# Altium PCB PCB2.PcbDoc
Units mm, origin at the board's own origin, x right, y up, seen from the top; angles counter-clockwise.
Board outline 72.9 x 66.06 mm, 2 copper layers (Top Layer, Bottom Layer); 41 components, 27 nets, 119 pads, 4 vias.
Unrouted connection lines stored in the file: 2.
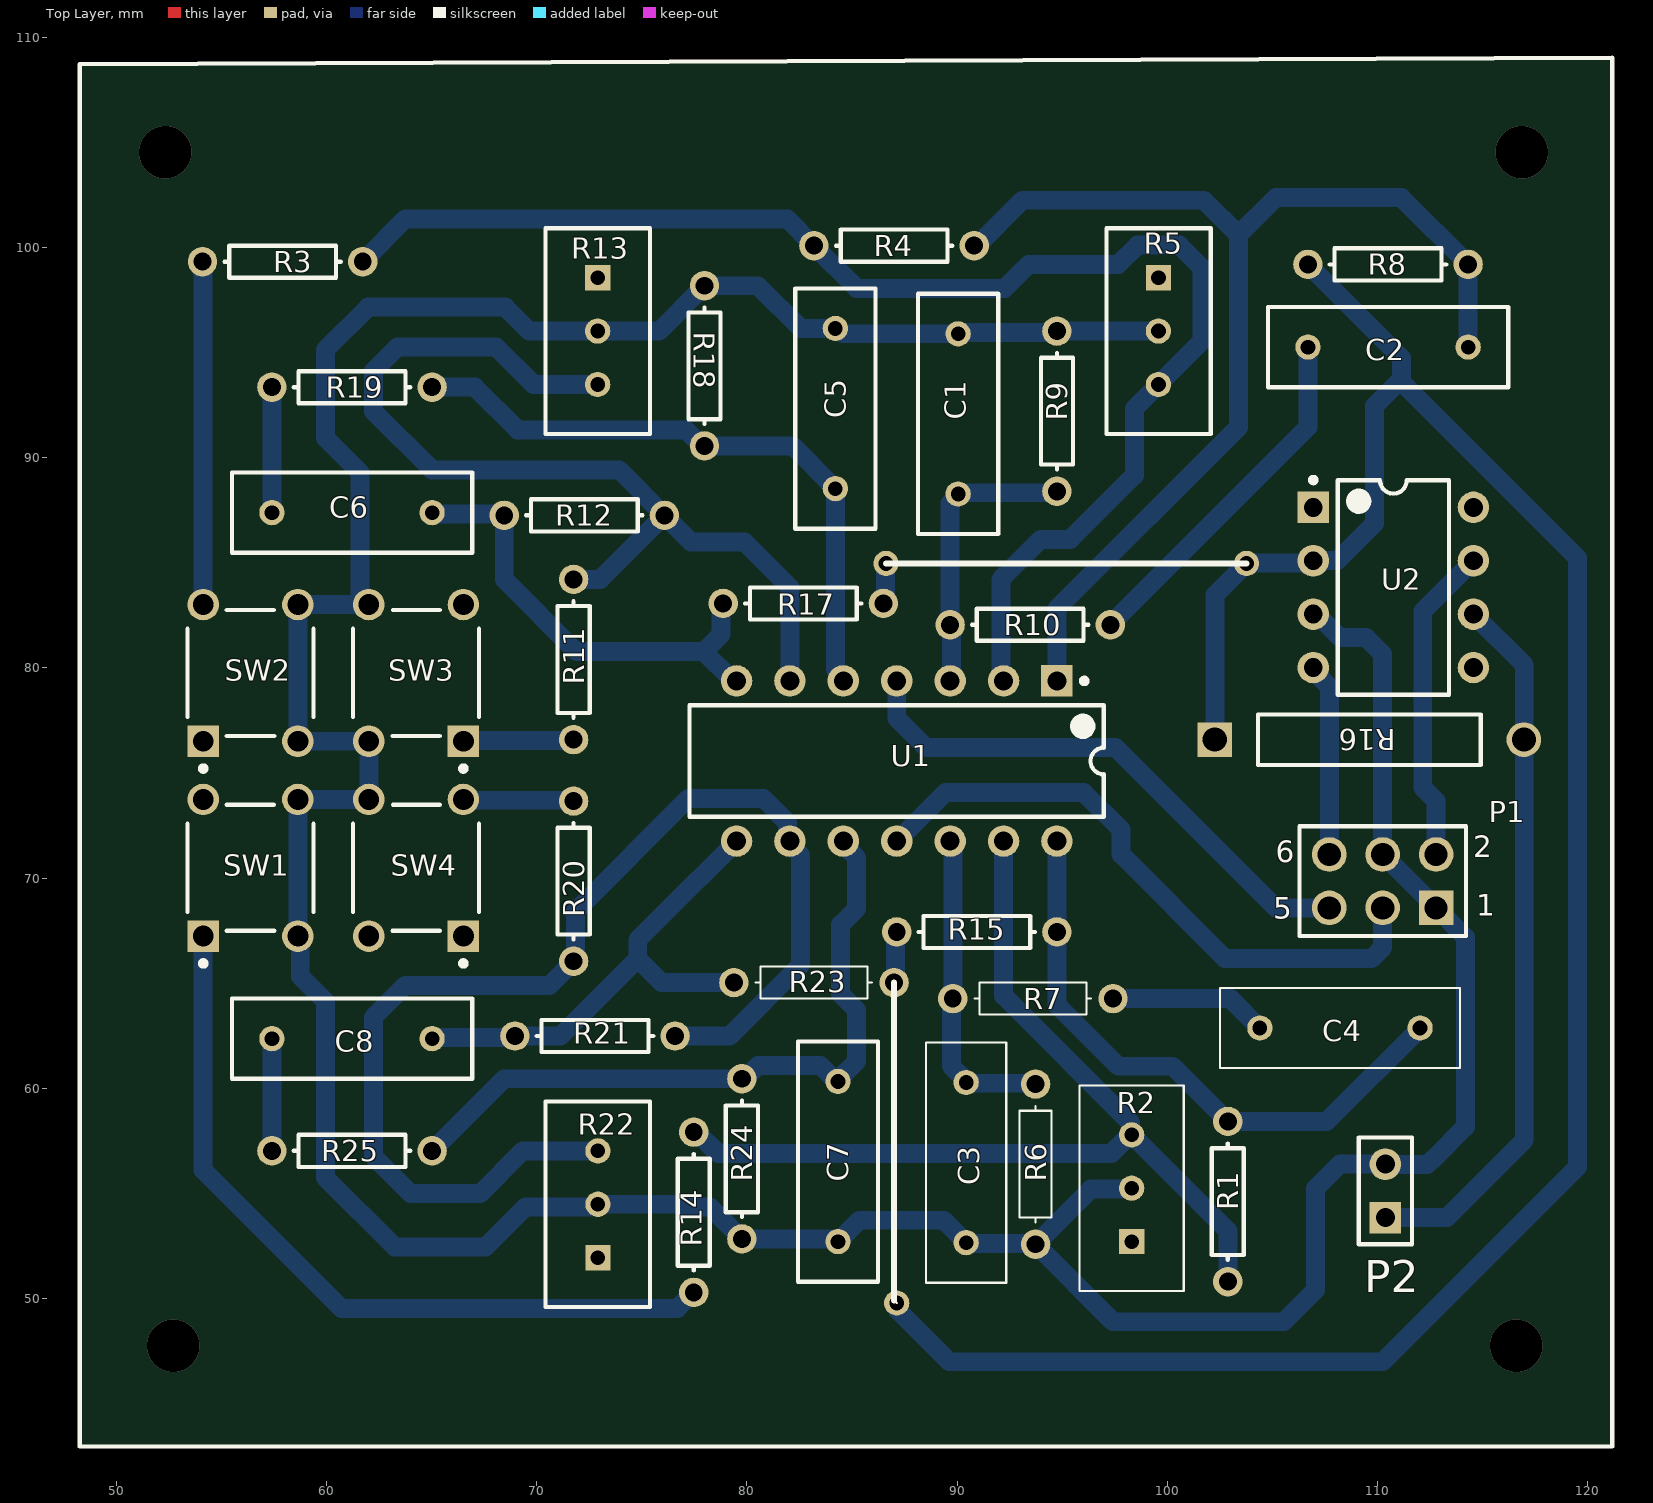
[diagram p0: Top Layer view]
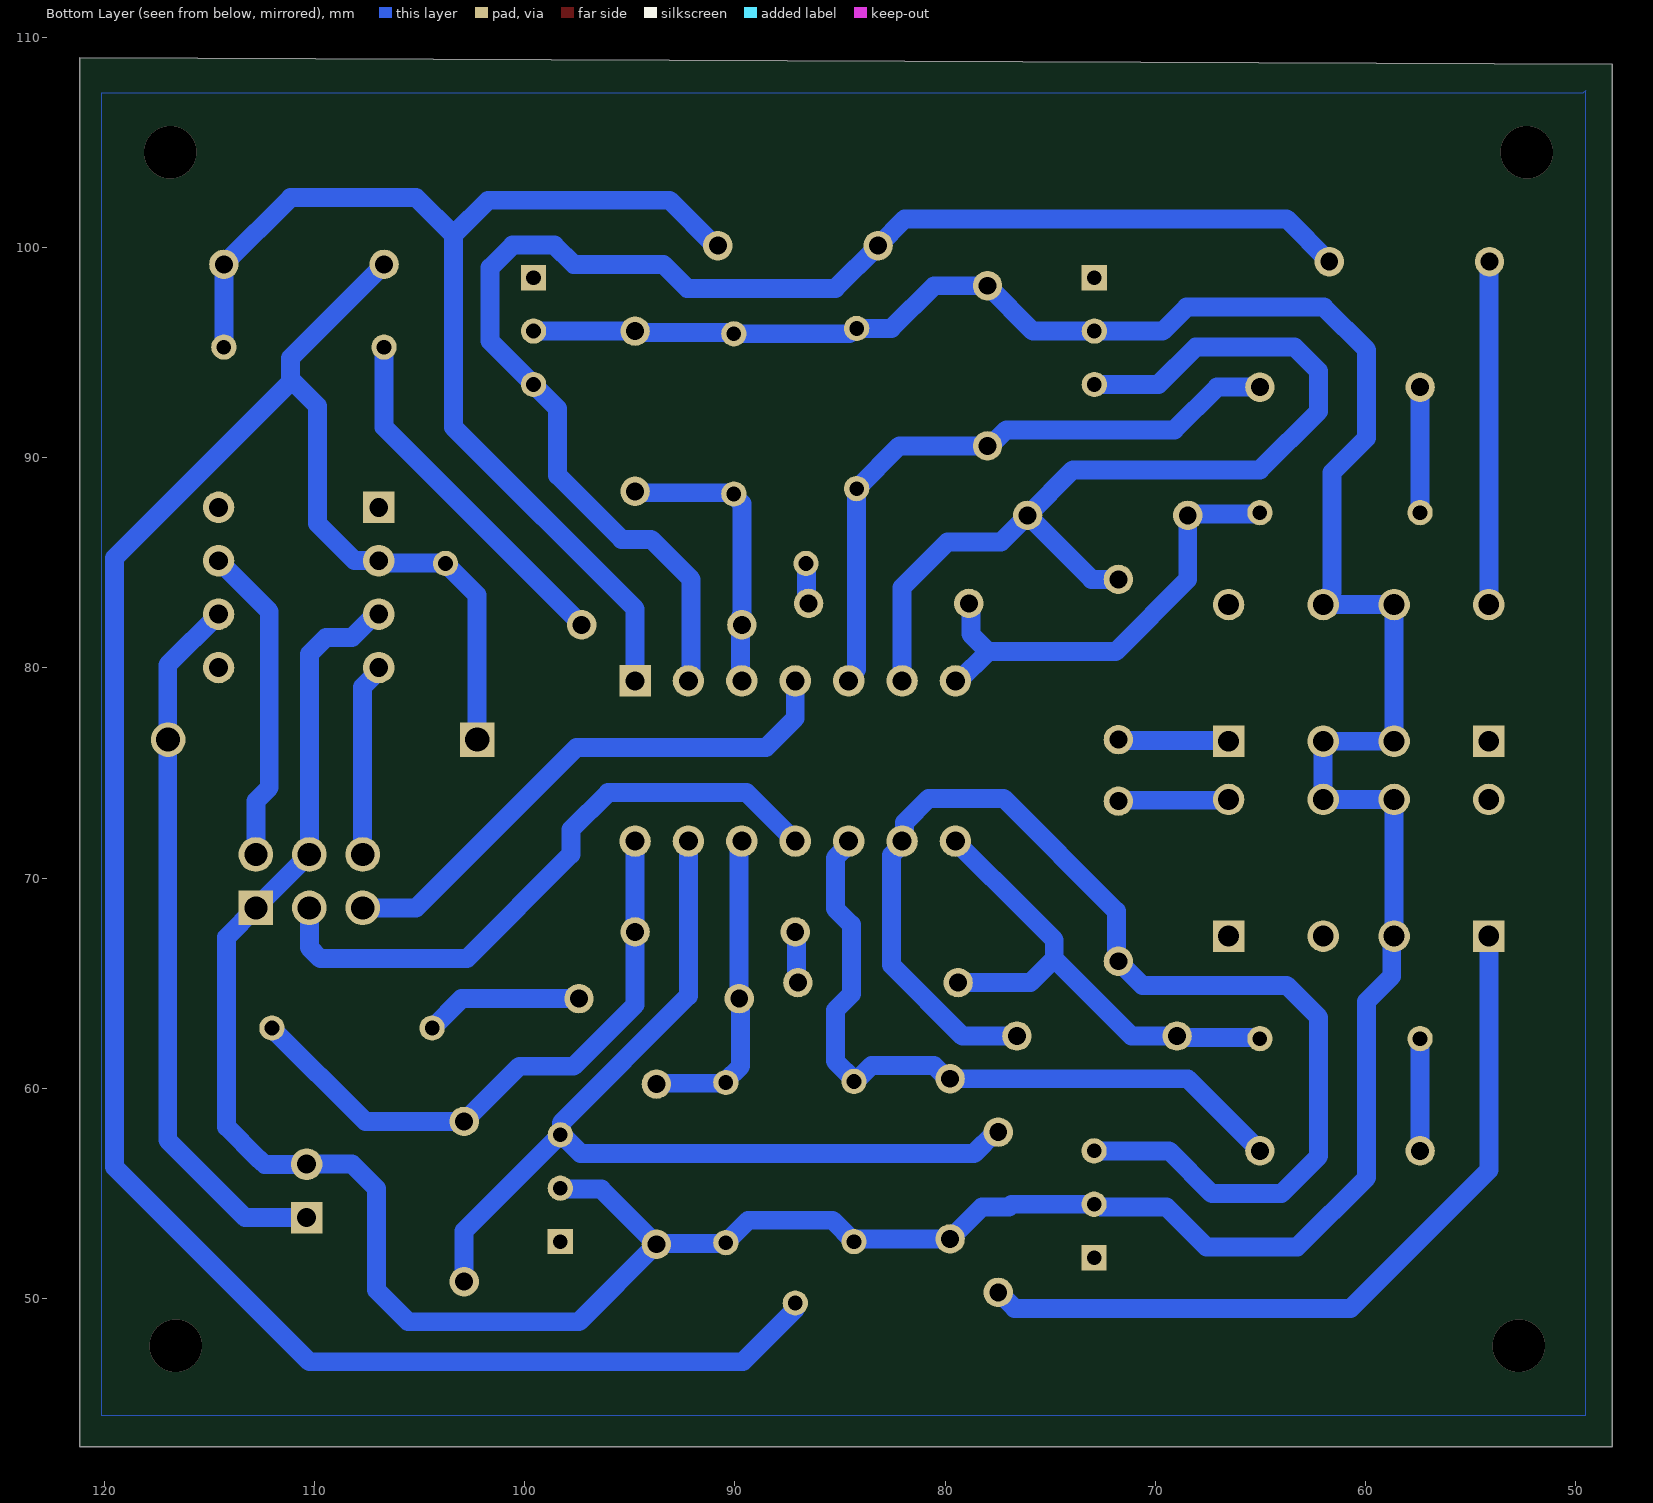
[diagram p1: Bottom Layer view, seen from below]

## Layer stack, top to bottom
Top Solder: solder mask 0.0102, Solder Resist, Dk 3.5
Top Layer: signal copper 0.0356
Dielectric 1: dielectric 0.32, FR-4, Dk 4.8
Bottom Layer: signal copper 0.0356
Bottom Solder: solder mask 0.0102, Solder Resist, Dk 3.5

## Board outline
48.26,42.958 48.26,50.419 48.26,108.706 121.158,109.018 121.158,93.091 121.158,42.958

## Design rules (kind name [scope] priority, off if disabled: settings)
Clearance [All] p1: gap=0.8 ignorepadtopadclearanceinfootprint=FALSE except(0: Arc-Hole Track-Hole SMDPad-Hole THPad-Hole Via-Hole Fill-Hole Poly-Hole Region-Hole Text-Hole; 0.254: Arc-Text Track-Text SMDPad-Text THPad-Text Via-Text Fill-Text Poly-Text Region-Text Text-Text; 0.3: Arc-SMDPad Arc-Via Track-SMDPad Track-Via SMDPad-SMDPad SMDPad-THPad SMDPad-Via THPad-THPad THPad-Via Via-Via; 0.5: Arc-THPad Track-THPad; 0.6: Arc-Arc Arc-Track Track-Track)
PolygonConnect [All] p1: connectstyle=Relief reliefconductorwidth=0.254 reliefentries=4 polygonreliefangle="90 Angle" airgapwidth=0.254
RoutingVias [All] p1: holewidth=0.711 width=1.27 viastyle="Through Hole" minholewidth=0.711 minwidth=1.27 maxholewidth=0.711 maxwidth=1.27
SolderMaskExpansion [All] p1: expansion=0.102 istentingtop=FALSE
Width [All] p1: maxlimit=1 minlimit=0.8 preferedwidth=0.9 toplayer_prefwidth=0.8 minimp=50.000000 maximp=50.000000 favimp=50.000000
30 further rules are at their usual default settings.

## Components (designator, comment, footprint, x,y, rotation, side; value= is the part's Value field where it differs from the comment)
C1 "Cap" RAD-0.3 90.043,92.075 r90 top value=100nF
C2 "Cap" RAD-0.3 110.49,95.25 r0 top value=100nF
C3 "Cap" RAD-0.3 90.424,56.465 r270 top value=100nF
C4 "Cap" RAD-0.3 108.204,62.865 r0 top value=100nF
C5 "Cap" RAD-0.3 84.201,92.329 r90 top value=100nF
C6 "Cap" RAD-0.3 61.214,87.376 r0 top value=100nF
C7 "Cap" RAD-0.3 84.328,56.515 r270 top value=100nF
C8 "Cap" RAD-0.3 61.214,62.357 r0 top value=100nF
P1 "61300621121" 61300621121 110.236,69.85 r180 top
P2 "Header 2" HDR1X2 110.363,53.848 r90 top
R1 "Res1" AXIAL-0.3 102.87,54.61 r270 top value=1K
R2 "3296W-1-204LF" FP-3296W-MFG 98.293,55.245 r0 top
R3 "Res1" AXIAL-0.3 57.912,99.314 r0 top value=50K
R4 "Res1" AXIAL-0.3 86.995,100.076 r180 top value=1K
R5 "3296W-1-204LF" FP-3296W-MFG 99.573,96.012 r180 top
R6 "Res1" AXIAL-0.3 93.726,56.388 r270 top value=6K
R7 "Res1" AXIAL-0.3 93.599,64.262 r0 top value=6K
R8 "Res1" AXIAL-0.3 110.49,99.187 r0 top value=8.33K
R9 "Res1" AXIAL-0.3 94.742,92.202 r90 top value=1.5K
R10 "Res1" AXIAL-0.3 93.472,82.042 r0 top value=1.5K
R11 "Res1" AXIAL-0.3 71.755,80.391 r90 top value=50K
R12 "Res1" AXIAL-0.3 72.263,87.249 r0 top value=1K
R13 "3296W-1-204LF" FP-3296W-MFG 72.903,96.012 r180 top
R14 "Res1" AXIAL-0.3 77.47,54.102 r90 top value=50K
R15 "Res1" AXIAL-0.3 90.932,67.437 r0 top value=3K
R16 "1k" RESA86-1060X240 109.601,76.581 r0 top
R17 "Res1" AXIAL-0.3 82.677,83.058 r180 top value=2.5K
R18 "Res1" AXIAL-0.3 77.978,94.361 r90 top value=2K
R19 "Res1" AXIAL-0.3 61.214,93.345 r180 top value=2K
R20 "Res1" AXIAL-0.3 71.755,69.85 r270 top value=50K
R21 "Res1" AXIAL-0.3 72.771,62.484 r0 top value=1K
R22 "3296W-1-204LF" FP-3296W-MFG 72.903,54.483 r0 top
R23 "Res1" AXIAL-0.3 83.185,65.024 r180 top value=420
R24 "Res1" AXIAL-0.3 79.756,56.642 r270 top value=3K
R25 "Res1" AXIAL-0.3 61.214,57.023 r180 top value=3K
SW1 "1825910-6" TECO-1825910-6_V#1 56.388,70.485 r90 top
SW2 "1825910-6" TECO-1825910-6_V#1 56.388,79.756 r90 top
SW3 "1825910-6" TECO-1825910-6_V#2 64.262,79.756 r90 top
SW4 "1825910-6" TECO-1825910-6_V#2 64.262,70.485 r90 top
U1 "LM324N" N0014A 87.122,75.565 r270 top
U2 "UA741CPE4" TI-P8 110.744,83.82 r0 top

## Footprints (in the part's own frame and the unit in brackets; to place one, negate y for a bottom-side part, rotate by r counter-clockwise, add the part's x,y. Pads: shape width x height; smd on the part's side, far side on the other; paste and mask are expansions set on the pad)
61300621121 [mm] "Pin Header, pitch 2.54 mm, THT, Vertical, dual row, 6p"
  rect 1.65x1.65 hole 1.1: 1(-2.54,1.27)
  round 1.65 hole 1.1: 2(-2.54,-1.27) 3(0,1.27) 4(0,-1.27) 5(2.54,1.27) 6(2.54,-1.27)
  silkscreen extent -3.96,-2.61 3.96,2.61, body extent -3.81,-2.54 3.81,2.54, height 5.59
AXIAL-0.3 [mm] "Axial Device, Thru-Hole; 2 Leads; 0.3 in Pin Spacing"
  round 1.4 hole 0.85: 1(-3.81,0) 2(3.81,0)
  silkscreen extent -2.77,-0.76 2.77,0.76
FP-3296W-MFG [mm]
  rect 1.2x1.2 hole 0.7 paste-1000 mask+0: 1(0.005,-2.54)
  round 1.2 hole 0.7 paste-1000 mask+0: 2(0.005,0) 3(0.005,2.54)
  silkscreen extent -2.48,-4.89 2.48,4.89, body extent -2.58,-4.99 2.58,4.99, height 0.25
HDR1X2 [mm] "Connector; Header; 2 Position"
  rect 1.5x1.5 hole 0.9: 1(0,0)
  round 1.5 hole 0.9: 2(2.54,0)
  silkscreen extent -1.27,-1.27 3.81,1.27
N0014A [mm] "DIP, 14-Leads, Body 19.7x6.6mm, Pitch 2.54mm"
  rect 1.5x1.5 hole 0.9: 1(-3.81,7.62)
  round 1.5 hole 0.9: 2(-3.81,5.08) 3(-3.81,2.54) 4(-3.81,0) 5(-3.81,-2.54) 6(-3.81,-5.08) 7(-3.81,-7.62) 8(3.81,-7.62) 9(3.81,-5.08) 10(3.81,-2.54) 11(3.81,0) 12(3.81,2.54) 13(3.81,5.08) 14(3.81,7.62)
  silkscreen extent -3.93,-9.85 2.65,9.85, body extent -3.95,-9.85 3.95,9.85, height 5.08
RAD-0.3 [mm] "Radial Cap, Thru-Hole; 2 Leads; 0.3 in Pin Spacing"
  round 1.2 hole 0.7: 1(-3.81,0) 2(3.81,0)
  silkscreen extent -5.71,-1.91 5.71,1.91
RESA86-1060X240 [mm] "Axial Resistor, 2-Leads, Dia 2.4mm, Body Length 10.6mm"
  rect 1.65x1.65 hole 1.15: 1(-7.35,0)
  round 1.65 hole 1.15: 2(7.35,0)
  silkscreen extent -5.3,-1.2 5.3,1.2, body extent -5.3,-1.2 5.3,1.2, height 2.4
TECO-1825910-6_V#1 [mm] "Switch, 4-Leads, Body 5.99x5.99mm"
  rect 1.5x1.5 hole 0.99: 1(-3.25,2.25)
  round 1.5 hole 0.99: 2(3.25,2.25) 3(-3.25,-2.25) 4(3.25,-2.25)
  silkscreen extent -4.67,-3 3,3, body extent -3,-2.99 2.99,3, height 5
TECO-1825910-6_V#2 [mm] "Switch, 4-Leads, Body 5.99x5.99mm"
  rect 1.5x1.5 hole 0.99: 1(-3.25,-2.25)
  round 1.5 hole 0.99: 2(3.25,-2.25) 3(-3.25,2.25) 4(3.25,2.25)
  silkscreen extent -4.67,-3 3,3, body extent -3,-3 2.99,2.99, height 5
TI-P8 [mm] "DIP, 8-Leads, Body 9.59x6.35mm, Pitch 2.54mm"
  rect 1.5x1.5 hole 0.9: 1(-3.81,3.81)
  round 1.5 hole 0.9: 2(-3.81,1.27) 3(-3.81,-1.27) 4(-3.81,-3.81) 5(3.81,-3.81) 6(3.81,-1.27) 7(3.81,1.27) 8(3.81,3.81)
  silkscreen extent -3.93,-5.1 2.65,5.23, body extent -3.95,-5.07 3.95,5.07, height 5.08

## Part data
C1 C2 C3 C4 C5 C6 C7 C8: "Capacitor", LatestRevisionDate=17-Jul-2002, LatestRevisionNote="Re-released for DXP Platform.", PackageDescription="Radial Cap, Thru-Hole; 2 Leads; 0.3 in Pin Spacing", PackageReference=RAD-0.3, Published=8-Jun-2000, Publisher="Altium Limited"
P1: library part CMP-1502-01072-1, "THT Vertical Pin Header WR-PHD, Pitch 2.54 mm, Dual Row, 6 pins", Contact Resistance=20mOhm, Manufacturer="Wurth Elektronik", Operating Temperature=-40to105degC, Rated Current=3A, Withstanding Voltage=500VAC, Working Voltage=250VAC, Datasheet URL=https://katalog.we-online.de/em/datasheet/6130xx21121.pdf, Gender=Male, Manufacturer URL=http://www.we-online.de, Mounting Technology=THT, Orientation=Vertical, Package Reference=61300621121, Packaging=Bag, Part Number=61300621121, Pin Number=6, Pitch=2.54mm, Publisher=WurthElektronik, Row Number=Dual
P2: "Header, 2-Pin", LatestRevisionDate=17-Jul-2002, LatestRevisionNote="Re-released for DXP Platform.", Publisher="Altium Limited"
R1 R3 R4 R6 R7 R8 R9 R10 R11 R12 R14 R15 R17 R18 R19 R20 R21 R23 R24 R25: "Resistor", LatestRevisionDate=17-Jul-2002, LatestRevisionNote="Re-released for DXP Platform.", PackageDescription="Axial Device, Thru-Hole; 2 Leads; 0.3 in Pin Spacing", PackageReference=AXIAL-0.3, Published=8-Jun-2000, Publisher="Altium Limited"
R2 R5 R13 R22: library part CMP-07234-000048-1, "TRIMMER 200K OHM 0.5W PC PIN TOP", Color=Blue, Max Operating Temperature=125°C, Max Power Dissipation=500mW, Min Operating Temperature=-55°C, Package Quantity=50, Resistance=200kR, Resistance Tolerance=10%, Resistor Type=Cermet, Temperature Coefficient=100ppm/°C, Contact Plating=Tin, Depth=4.83mm, Height=0.395inch, Lead Free="Lead Free", Length=9.53mm, Military Standard=Not, Mount=Panel, Number of Turns=25, Packaging=Rail/Tube, Power Rating=500mW, Radiation Hardening=No, REACH SVHC="No SVHC", RoHS Compliant=Yes, Series=3296, Taper=Linear, Technology=CERMET, Termination=Pin, Tolerance=10%, Weight=0.03oz, Width=9.53mm
R16: library part CMP-1678-00005-1, "Axial Resistor, 50 mOhm, +/- 1%, 2 W, -55 to 275 degC, 2-Pin THD, RoHS, Bulk", Case\Package=SOIC, Max Dual Supply Voltage="16 V", Max Operating Temperature="70 degC", Min Dual Supply Voltage="1.5 V", Min Operating Temperature="0 degC", Nominal Dual Supply Voltage="12 V", Nominal Supply Current="1.2 mA", Nominal Voltage Gain="100 dB", Output Current="30 mA", Package Quantity=1, Bandwidth="700 KHz", Channels=2, Common Mode Rejection Ratio="65 dB", ComponentLink1Description="Manufacturer URL", ComponentLink1URL=http://www.ohmite.com/, ComponentLink2Description=Datasheet, ComponentLink2URL=http://www.ohmite.com/cat/res_10.pdf, DatasheetVersion=Jun-15, Height="1.58 mm", Length="4.9 mm", Max Supply Voltage="16 V", Min Supply Voltage="1.5 V", Mount="Surface Mount", Nominal Gain Bandwith Product="700 KHz", Nominal Supply Voltage="12 V", PackageDescription="2-Pin Axial Lead, Dia 2.4 mm, Body Length 10.6 mm", PackageReference=12FR050E, Packaging="Cut Tape", Pins=8, Radiation Hardening=No, REACH SVHC="No SVHC", RoHSCompliant=true, Slew Rate="0.3 V\us", Unity Gain Bandwidth Product="700 KHz", Width="3.91 mm"
SW1 SW2 SW3 SW4: library part CMP-1684-00021-1, "Tact Switch, SPST-NO, 0.05 A, -35 to 85 degC, 4-Pin THD, RoHS, Bulk", Actuator Color=Black, Contact Rating @ Voltage=0.05A@24VDC, Dielectric Strength=500VAC, Manufacturer="TE Connectivity", Maximum AC Voltage Rating=N/A, Maximum Contact Resistance=100mOhm, Maximum DC Voltage Rating=24V, Minimum Insulation Resistance=100MOhm, Operating Temperature=-35to85C, Package Description="4-Pin Through Hole Device, Body 5.99 x 5.99 mm, Pitch 6.5 mm", Package Reference=THD, Actuator Length=1.4mm, Actuator Material=PolybutyleneTerephthalate, Actuator Style=RoundButton, Base Material=N/A, Body Orientation=Straight, Bushing Type=Unthreaded, Contact Material=CopperAlloy, Contact Plating=Silver, Datasheet URL=http://www.te.com/commerce/DocumentDelivery/DDEController?Action=showdoc&DocId=Customer+Drawing%7F1825910%7FC9%7Fpdf%7FEnglish%7FENG_CD_1825910_C9.pdf%7F1825910-6, Datasheet Version="Rev. C9", Dimension=5.99x5mm, Electrical Life=100000Cycles, Family=1825910, Function=MomentaryContact, Housing Material=N/A, Illumination=N/R, Manufacturer URL=http://www.te.com, Mechanical Life=100000Cycles, Mounting=ThroughHole, Packaging=N/A, Part No=1825910-6, Pole Throw Configuration=SPST, Product Weight=N/A, RoHS=Yes, Seal Description=N/A, Seal Location=N/A, Switch Configuration=OFF(ON), Terminal Type=PCPins, Thread Size=N/R
U1: library part CMP-0055-00082-3, "Low Power Quad Operational Amplifier, 14-pin MDIP", Manufacturer="Texas Instruments", Package Reference=N0014A, PackageTopMarking=NSUZXYYTTE#*LM324N, PowerWise=N, Code_JEDEC=MS-001-AA, ComponentLink1Description="Datasheet URL", ComponentLink1URL=http://www.ti.com/general/docs/lit/getliterature.tsp?genericPartNumber=LM324&fileType=pdf, CompType=Amplifiers, PackageDescription="MDIP, .750 x .250 x.130in, 14 Lead, .100in Pitch", PinCount=14, RoHS=N
U2: library part CMP-0017-00974-1, "General-Purpose Operational Amplifier, 7 to 36 V, 0 to 70 degC, 8-pin DIP (P8), Pb-Free (RoHS)", Manufacturer="Texas Instruments", Total Supply Voltage(Max)(+5V is 5, +/-5V is 10)=36, Total Supply Voltage(Min)(+5V is 5, +/-5V is 10)=7, CMRR(Min)(dB)=70, Code_JEDEC=MS-001, ComponentLink1Description="Manufacturer URL", ComponentLink1URL=http://www.ti.com/, ComponentLink2Description=Datasheet, ComponentLink2URL=http://www.ti.com/lit/ds/symlink/ua741.pdf, ComponentLink3Description="Package Specification", ComponentLink3URL=http://www.ti.com/litv/pdf/mpdi001b, DatasheetVersion=SLOS094B, Eco-Plan="Pb-Free (RoHS)", GBW(Typ)(MHz)=1, IIB(Max)(pA)=1500000, Iq per channel(Max)(mA)=2.8, Mounting Technology="Through Hole", Number of Channels=1, PackageDescription="8-Pin Plastic In-Line, Body 9.59 x 6.35 mm, Pitch 2.54 mm", PackageReference=P8, PackageVersion="4040082/E, 04/2010", PartNumber=UA741CPE4, Slew Rate(Typ)(V/us)=0.5, Sub Family="General Purpose Amplifier, High Supply Voltage Amplifier (>=30V)", Vio (25C)(Max)(mV)=6

## Free pads (board coordinates)
  round 1.2 hole 0.7: 13(103.759,84.963) 14(87.122,49.784) 15(86.614,84.963)

## Via types
v1: diameter 2.5, hole 2.5, Top Layer to Bottom Layer, 4 vias

## Nets (pads, with @x,y where several pads share a name; then routed paths per layer and width w, separated by ;. In a path a pad name is that pad's centre, name@x,y a point inside that pad or via, vN(x,y) a via of type N, cw(c..) or ccw(c..) an arc to the next point about the centre after c; other vN are vias at no path point)
+5: P1.5 U1.4 | length 26.1
  Bottom Layer w0.9: U1.4 87.122,77.597 88.519,76.2 97.536,76.2 105.156,68.58 P1.5
+12: P1.2 U2.7 | length 15.2
  Bottom Layer w0.9: P1.2 112.776,73.66 112.141,74.295 112.141,82.677 U2.7
-5: P1.3 U1.11 | length 30.1
  Bottom Layer w0.9: U1.11 89.432,74.065 96.026,74.065 97.79,72.301 97.79,71.12 102.743,66.167 109.709,66.167 110.236,66.694 P1.3
-12: P1.6 U2.4 | length 9.4
  Bottom Layer w0.9: U2.4@107.049,79.895 U2.4 106.934,79.848 107.696,79.086 P1.6
GND: C1.2 C3.2 C5.2 C7.2 P1.1 P1.4 P2.2 R2.2 R5.2 R6.2 R9.2 R13.2 R18.2 R22.2 R24.2 SW1.3 SW1.4 SW2.3 SW2.4 SW3.3 SW3.4 SW4.4 U2.3 | length 193.9
  Bottom Layer w0.9: R2.2 98.253,55.2 96.348,55.2 R6.2 ; R5.2 R9.2 94.672,95.942 90.1,95.942 C1.2 84.536,95.885 84.282,96.139 C5.2 82.55,96.139 80.518,98.171 R18.2 75.819,96.012 R13.2 69.648,96.012 68.505,97.155 61.976,97.155 59.944,95.123 59.944,90.932 61.595,89.281 61.595,83.585 62.012,83.168 SW3.4 SW2.4 SW2.3 SW3.3 SW4.4 SW1.4 SW1.3 58.753,67.12 58.753,65.326 59.944,64.135 59.944,55.753 63.246,52.451 67.564,52.451 69.469,54.356 72.569,54.356 72.638,54.426 72.851,54.426 R22.2 76.835,54.483 76.962,54.356 78.232,54.356 R24.2 84.12,52.832 84.247,52.705 C7.2 85.344,53.721 89.358,53.721 C3.2 90.462,52.617 93.687,52.617 R6.2 ; U2.3 107.096,82.55 108.201,81.445 109.436,81.445 110.236,80.645 P1.4 P1.1 114.173,67.183 114.173,58.166 112.663,56.656 112.651,56.644 112.357,56.379 110.372,56.379 P2.2 108.204,56.388 107.049,55.233 107.049,50.407 105.537,48.895 97.409,48.895 R6.2
NetC1_1: C1.1 R9.1 R10.1 U1.3 | length 13.9
  Bottom Layer w0.9: U1.3 89.725,79.438 R10.1@89.725,82.042 ; R10.1@89.789,82.042 89.693,82.138 89.693,82.491 89.662,82.523 89.662,87.803 90.043,88.184 C1.1 90.1,88.322 94.672,88.322 R9.1
NetC2_1: C2.1 R10.2 | length 17.1
  Bottom Layer w0.9: R10.2 106.68,91.44 C2.1
NetC2_2: C2.2 R4.1 R8.2 U1.1 | length 55.8
  Bottom Layer w0.9: R4.1 90.94,100.076 93.099,102.235 101.727,102.235 103.378,100.584 ; U1.1 94.742,82.804 103.378,91.44 103.378,100.584 ; C2.2 R8.2 111.125,102.362 105.156,102.362 103.378,100.584
NetC3_1: C3.1 R6.1 R7.1 U1.12 | length 15.2
  Bottom Layer w0.9: U1.12 89.777,71.64 89.777,71.216 89.789,71.204 R7.1 ; R7.1@89.725,64.262 89.725,61.055 90.424,60.356 C3.1 90.462,60.237 93.687,60.237 R6.1
NetC4_1: C4.1 R7.2 | length 7.6
  Bottom Layer w0.9: R7.2 102.997,64.262 C4.1
NetC4_2: C4.2 R1.1 R15.2 U1.14 | length 29.2
  Bottom Layer w0.9: U1.14 94.742,63.97 97.665,61.047 100.243,61.047 R1.1 107.569,58.42 C4.2
NetC5_1: C5.1 R18.1 R19.1 U1.5 | length 30.5
  Bottom Layer w0.9: R19.1 67.056,93.345 69.088,91.313 77.081,91.313 77.843,90.551 82.169,90.551 C5.1 84.201,79.918 84.582,79.537 U1.5
NetC6_1: C6.1 R19.2 | length 6
  Bottom Layer w0.9: C6.1 R19.2
NetC6_2: C6.2 R12.1 R17.2 U1.7 | length 22.2
  Bottom Layer w0.9: C6.2 65.081,87.319 68.383,87.319 R12.1 68.453,84.201 71.882,80.772 77.943,80.772 ; R17.2 78.771,82.962 78.771,81.601 77.943,80.772 ; U1.7 79.34,79.375 77.943,80.772
NetC7_1: C7.1 R24.1 R25.1 U1.10 | length 34
  Bottom Layer w0.9: R25.1 68.453,60.452 R24.1 79.891,60.452 80.526,61.087 83.485,61.087 84.247,60.325 C7.1 84.328,60.406 85.217,61.295 85.217,63.711 84.455,64.473 84.455,67.78 85.217,68.542 85.217,70.958 84.582,71.593 U1.10
NetC8_1: C8.1 R25.2 | length 5.3
  Bottom Layer w0.9: R25.2 C8.1
NetC8_2: C8.2 R21.1 R23.2 U1.8 | length 24.1
  Bottom Layer w0.9: C8.2 65.081,62.414 68.891,62.414 R21.1 71.12,62.484 74.803,66.167 ; R23.2@79.279,64.928 R23.2 75.946,65.024 74.803,66.167 ; U1.8 75.946,68.199 74.803,67.056 74.803,66.167
NetP2_1: P2.1 R16.2 U2.6 | length 34.1
  Bottom Layer w0.9: P2.1 113.284,53.848 116.967,57.531 116.967,80.137 U2.6
NetR1_2: R1.2 R2.3 R14.2 U1.13 | length 47
  Bottom Layer w0.9: R14.2 77.605,57.912 78.621,56.896 97.328,56.896 98.217,57.785 R2.3 ; U1.13 92.202,64.389 98.241,58.35 98.241,57.842 R2.3 ; R1.2 102.87,53.213 R2.3
NetR3_1: R3.1 SW2.2 | length 16.3
  Bottom Layer w0.9: R3.1 54.12,99.296 54.12,83.024 SW2.2
NetR3_2: R3.2 R4.2 R5.3 U1.2 | length 67.9
  Bottom Layer w0.9: R3.2 63.754,101.346 81.915,101.346 R4.2 85.217,98.044 92.259,98.044 93.402,99.187 97.659,99.187 98.574,100.102 100.562,100.102 101.635,99.029 101.635,95.539 98.425,92.329 98.425,89.154 95.377,86.106 93.98,86.106 92.075,84.201 92.075,79.926 92.087,79.914 92.087,79.49 U1.2
NetR8_1: pad.13 pad.14 pad.15 R8.1 R15.1 R16.1 R17.1 R23.1 U2.2 | length 113.5
  Bottom Layer w0.9: R17.1 86.583,83.154 86.583,84.932 pad.15 ; R23.1 87.058,65.088 87.058,67.373 R15.1 ; pad.14 87.122,49.48 89.612,46.99 110.236,46.99 119.507,56.261 119.507,85.217 111.188,93.535 110.934,93.535 109.855,92.456 109.855,86.868 108.09,85.103 106.947,85.103 106.819,84.975 103.771,84.975 pad.13 102.251,83.455 R16.1 ; R8.1 111.125,94.742 111.125,93.535
NetR11_1: R11.1 SW3.1 | length 5.3
  Bottom Layer w0.9: SW3.1 66.549,76.544 71.718,76.544 R11.1
NetR11_2: R11.2 R12.2 R13.3 U1.6 | length 47.1
  Bottom Layer w0.9: R11.2 73.025,84.201 R12.2 ; R13.3 69.85,93.472 68.072,95.25 63.373,95.25 62.23,94.107 62.23,92.202 65.024,89.408 73.914,89.408 R12.2 ; U1.6 82.042,83.82 79.883,85.979 77.343,85.979 R12.2
NetR14_1: R14.1 SW1.1 | length 37.5
  Bottom Layer w0.9: SW1.1 54.12,67.217 54.12,56.116 60.706,49.53 76.693,49.53 77.455,50.292 R14.1
NetR20_1: R20.1 SW4.2 | length 5.3
  Bottom Layer w0.9: SW4.2 66.549,73.697 71.718,73.697 R20.1
NetR20_2: R20.2 R21.2 R22.3 U1.9 | length 59.1
  Bottom Layer w0.9: R22.3 69.342,57.023 67.31,54.991 64.008,54.991 62.23,56.769 62.23,63.373 63.754,64.897 70.612,64.897 71.851,66.136 71.851,68.422 77.216,73.787 80.772,73.787 81.927,72.632 81.927,71.87 U1.9 82.042,71.593 82.55,71.085 82.55,65.866 79.168,62.484 R21.2
pads on no net: R2.1 R5.1 R13.1 R22.1 SW1.2 SW2.1 SW3.2 SW4.1 SW4.3 U2.1 U2.5 U2.8
copper on no net:
  other v1: 52.705,47.752 116.586,47.752 52.324,104.521 116.84,104.521

## Polygon pours and split planes (outlines as drawn)
no net on Bottom Layer "NONET_L02_P000" (solid, pour order 0): 49.53,107.442 49.657,107.315 120.142,107.315 120.142,44.45 49.53,44.45

## Silkscreen, mask and mechanical layers (free items; w line width, h text height)
Top Overlay:
  lines w0.1: 86.995,49.911 87.122,49.784
  lines w0.2: 48.26,42.958 50.133,42.958 121.158,42.958 121.158,93.091 121.158,109.018 48.26,108.706 48.26,50.419 48.26,42.958
  lines w0.3: 86.614,84.963 99.314,84.963 103.759,84.963 ; 86.995,49.911 86.995,65.024

## Text inside footprints (layer, text, board x,y; h text height)
P1: Top Overlay "6" at 105.156,70.739 h1.02; Top Overlay "5" at 105.029,68.072 h1.02; Top Overlay "2" at 114.554,70.993 h1.02; Top Overlay "1" at 114.681,68.199 h1.02